# Altium PCB Board_MCU_v3.PcbDoc
Units mm, origin at the board's own origin, x right, y up, seen from the top; angles counter-clockwise.
Board outline 50.04 x 32.77 mm, 2 copper layers (Top Layer, Bottom Layer); 25 components, 34 nets, 121 pads, 0 vias.
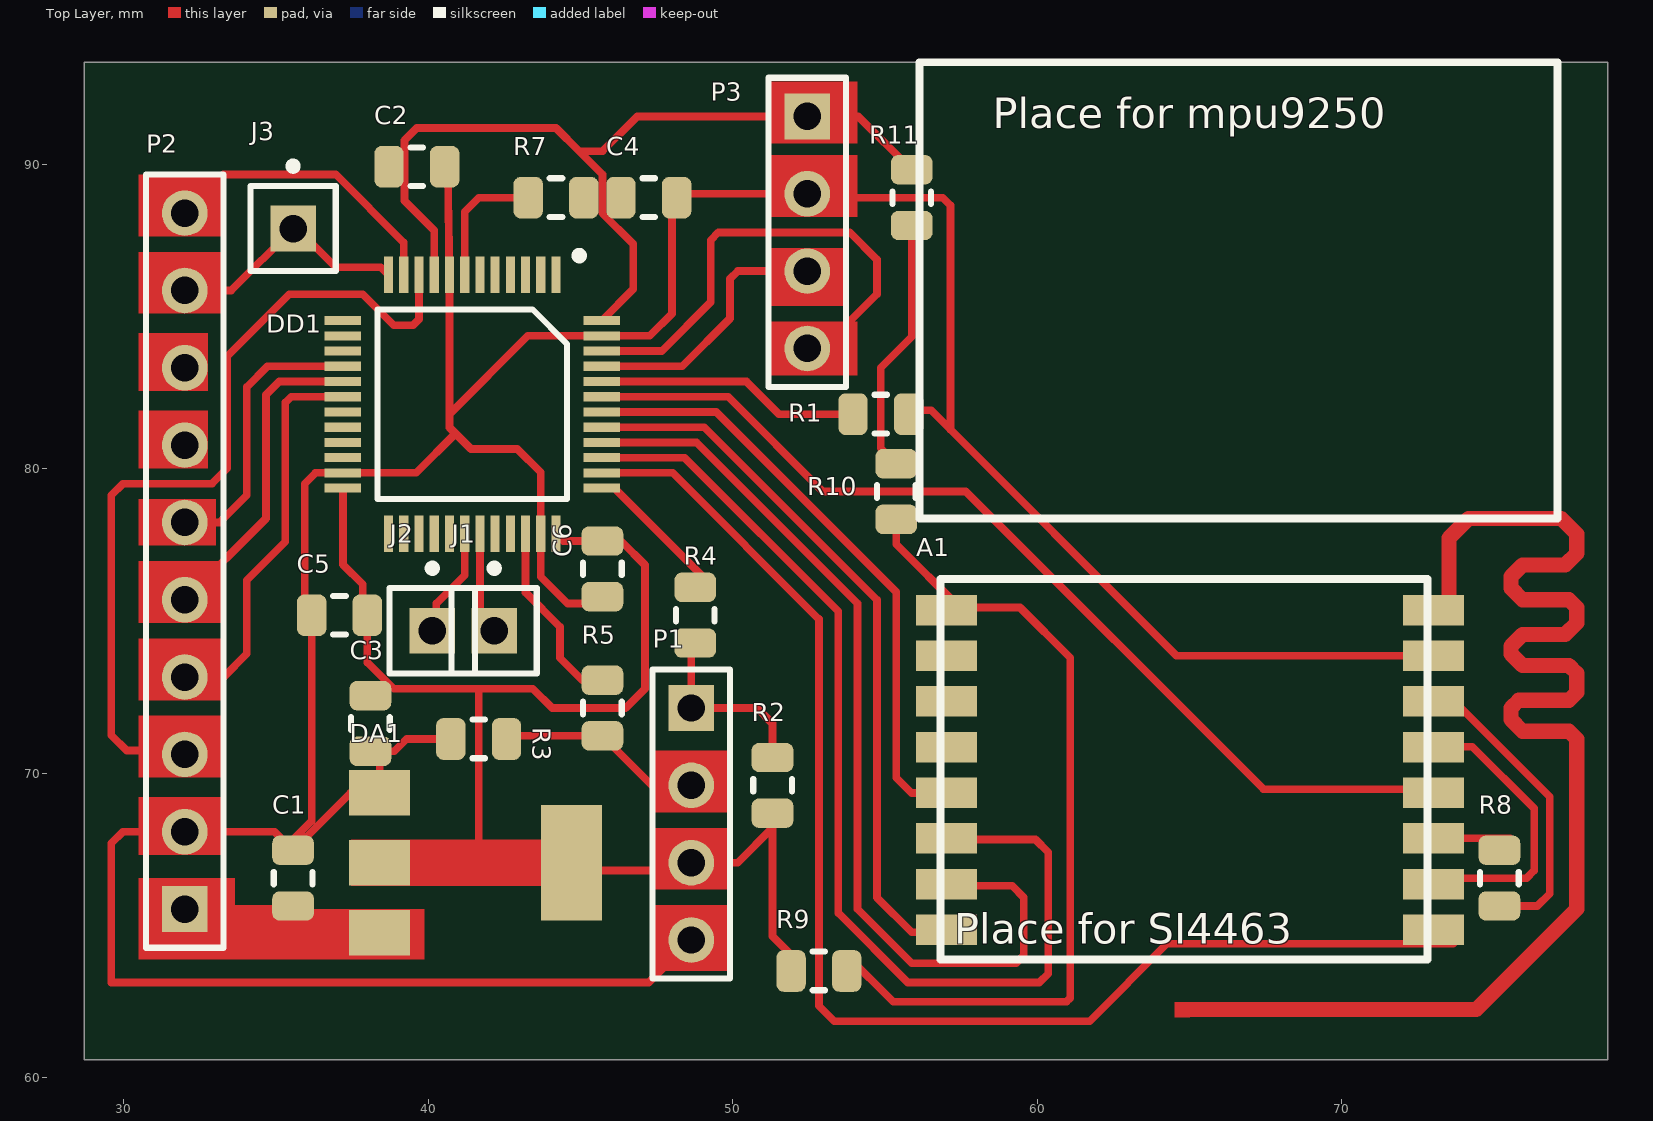
[diagram p0: Top Layer view]
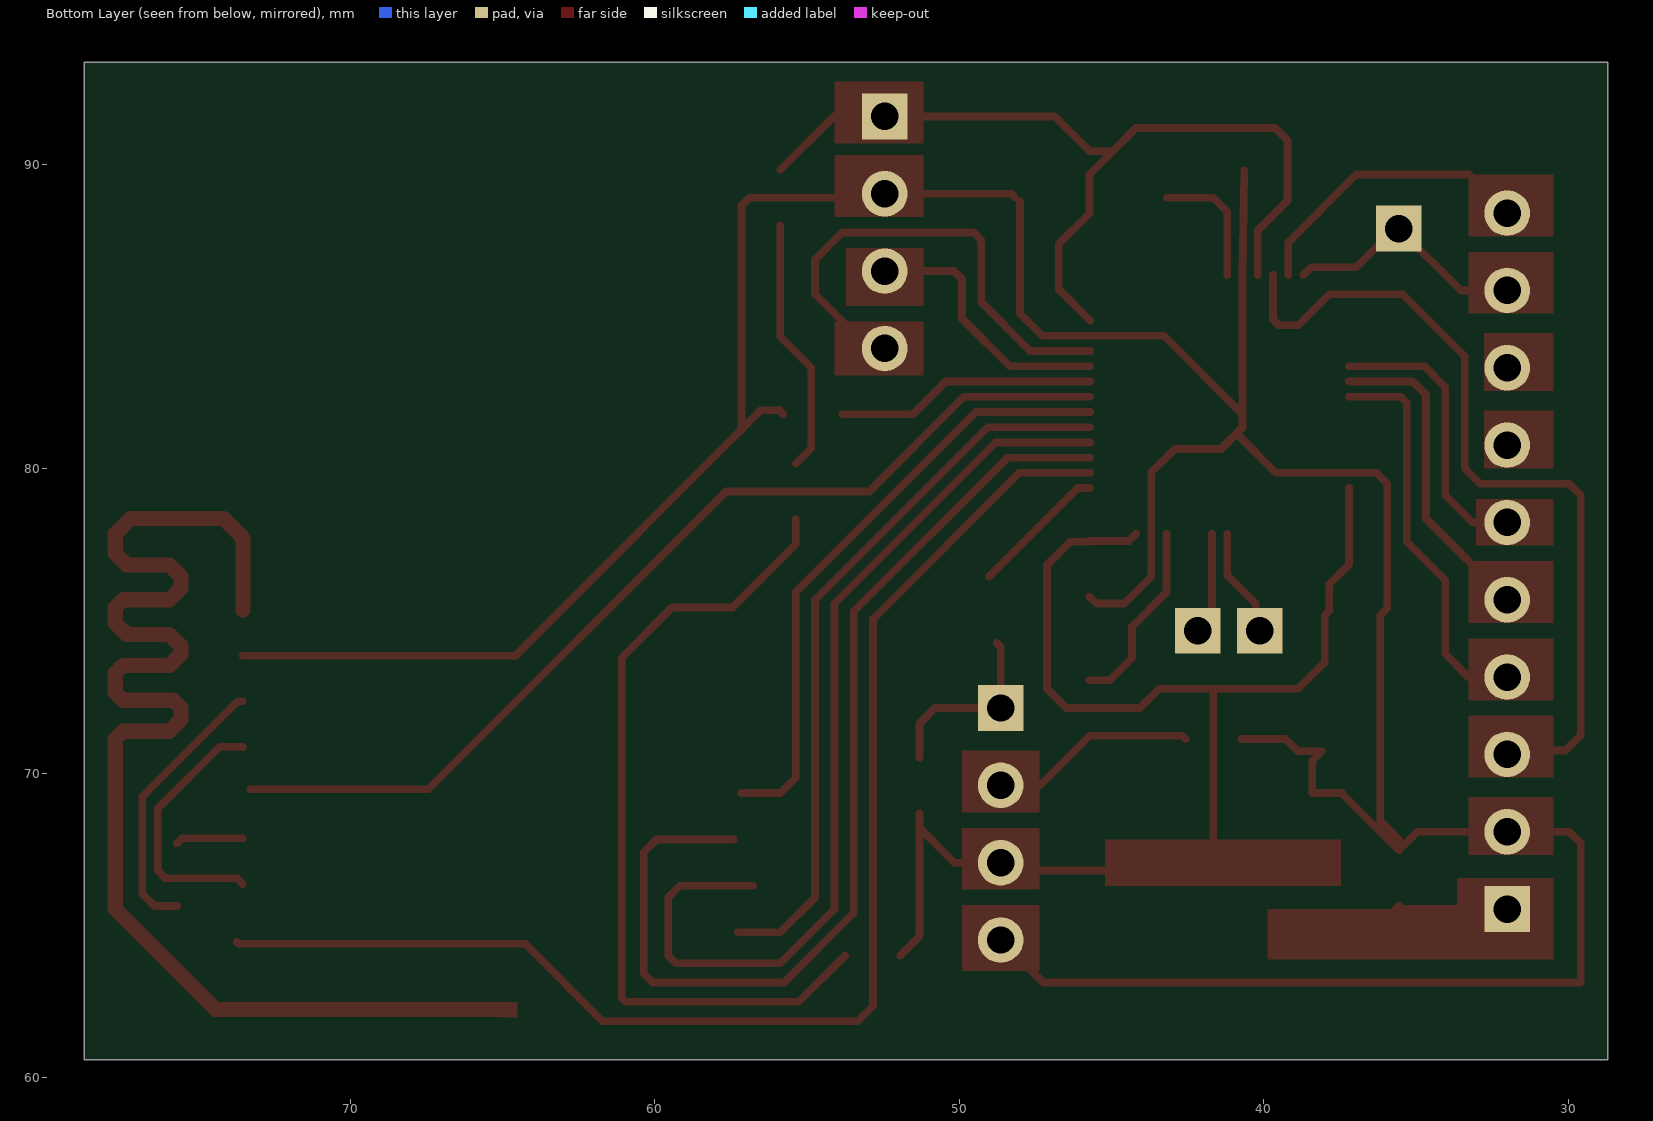
[diagram p1: Bottom Layer view, seen from below]
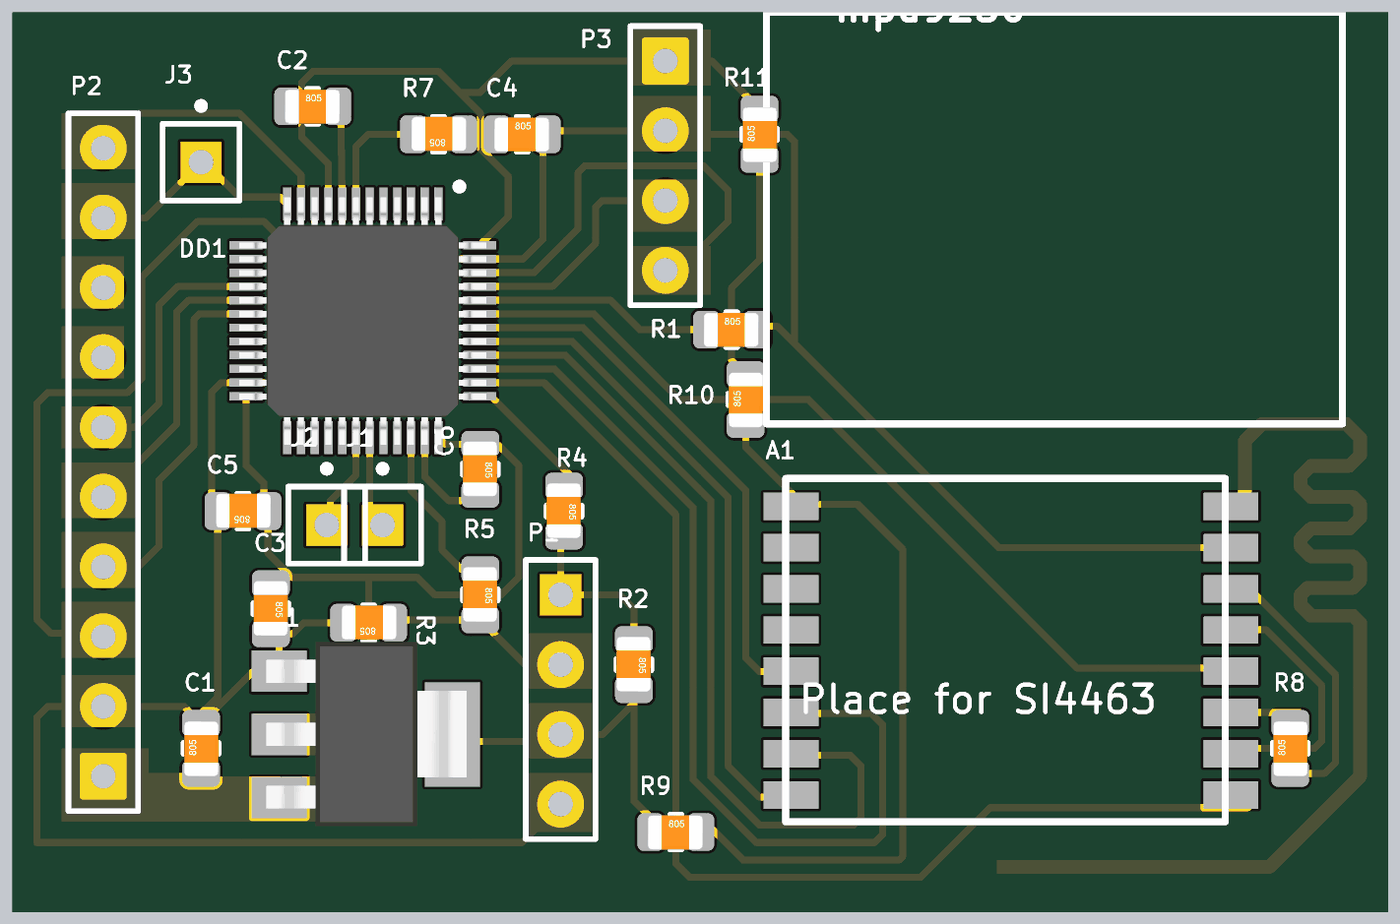
[diagram p2: 3D render of the assembled board from above, using the file's embedded part models]

## Layer stack, top to bottom
Top Layer: signal copper 0.0356
Dielectric: dielectric 0.32, FR-4, Dk 4.8
Bottom Layer: signal copper 0.0356

## Board outline
28.702,60.579 28.702,93.345 78.74,93.345 78.74,60.579

## Design rules (kind name [scope] priority, off if disabled: settings)
Clearance [All] p1: gap=0.1
ComponentClearance [All] p1 off: gap=0.254 collisioncheckmode=3 verticalgap=0.254 showdistances=FALSE
MinimumSolderMaskSliver [All] p1 off: minsoldermaskwidth=0.05
PolygonConnect [All] p1: connectstyle=Relief reliefconductorwidth=0.254 reliefentries=4 polygonreliefangle="90 Angle"
RoutingVias [All] p1: holewidth=0.711 width=1.27 viastyle="Through Hole" minholewidth=0.711 minwidth=1.27 maxholewidth=0.711 maxwidth=1.27
SilkToSilkClearance [All] p1 off: silktosilkclearance=0.254
SilkscreenOverComponentPads [IsPad] p1 off: minsilkscreentomaskgap=0.254
SolderMaskExpansion [All] p1: expansion=0.102
TestPointUsage [All] p1: valid=0 allowmultiple=FALSE
Testpoint [All] p1: side=3 testpointundercomponent=TRUE minsize=1.016 maxsize=2.54 preferedsize=1.524 minholesize=0 maxholesize=1.016 preferedholesize=0.813 testpointgrid=0.025 style=297 order=0123456789
Width [All] p1: maxlimit=2 minlimit=0.254 preferedwidth=0.5
20 further rules are at their usual default settings.

## Components (designator, comment, footprint, x,y, rotation, side; value= is the part's Value field where it differs from the comment)
A1 "Module SI4463" MODULE_SI44663 65.024,70.104 r0 top
C1 "1uF" 0805cap 35.56,66.548 r90 top
C2 "0.1uF" 0805cap 39.624,89.916 r0 top
C3 "1uF" 0805cap 38.1,71.628 r270 top
C4 "0.1uF" 0805cap 47.244,88.9 r0 top
C5 "0.1uF" 0805cap 37.084,75.184 r180 top
C6 "0.1uF" 0805cap 45.72,76.708 r270 top
DA1 "AMS1117-3.3" SOT-223 44.704,67.056 r270 top
DD1 "STM32F103C8T6" STM32L151C 44.196,86.36 r270 top
J1 "Socket" PIN1 42.164,74.676 r0 top
J2 "Socket" PIN1 40.132,74.676 r0 top
J3 "Socket" PIN1 35.56,87.884 r0 top
P1 "Header 4" HDR1X4 48.641,72.136 r270 top
P2 "Header 10" HDR1X10 32.004,65.532 r90 top
P3 "Header 4" HDR1X4 52.451,91.567 r270 top
R1 "10k" 0805res 54.864,81.788 r0 top
R2 "1k N/C" 0805res 51.308,69.596 r270 top
R3 "1k N/C" 0805res 41.656,71.12 r180 top
R4 "150" 0805res 48.768,75.184 r270 top
R5 "150" 0805res 45.72,72.136 r270 top
R7 "1k" 0805res 44.196,88.9 r180 top
R8 "0" 0805res 75.184,66.548 r90 top
R9 "0" 0805res 52.832,63.5 r0 top
R10 "0" 0805res 55.372,79.248 r90 top
R11 "0" 0805res 55.88,88.9 r90 top

## Footprints (in the part's own frame and the unit in brackets; to place one, negate y for a bottom-side part, rotate by r counter-clockwise, add the part's x,y. Pads: shape width x height; smd on the part's side, far side on the other; paste and mask are expansions set on the pad)
0805cap [mil] "http://www.vishay.com/docs/60031/m.pdf (Case 0805) http://www.yageo.com/pdf/NP0_50-to-500V_10.pdf (Case 0805)"
  rrect50% 38x54 smd mask+4: 1(-36,0) 2(36,0)
  silkscreen extent -8,-25 8,25, body extent -40,-25 39,24, height 31
0805res [mil] "http://www.vishay.com/docs/60031/m.pdf (Case 0805) http://www.yageo.com/pdf/NP0_50-to-500V_10.pdf (Case 0805)"
  rrect50% 38x54 smd mask+4: 1(-36,0) 2(36,0)
  silkscreen extent -8,-25 8,25, body extent -40,-25 39,24, height 31
HDR1X4 [mm] "Connector; Header; 4 Position"
  rect 1.5x1.5 hole 0.9: 1(0,0)
  round 1.5 hole 0.9: 2(2.54,0) 3(5.08,0) 4(7.62,0)
  silkscreen extent -1.27,-1.27 8.89,1.27
HDR1X10 [mm] "Connector; Header; 10 Position"
  rect 1.5x1.5 hole 0.9: 1(0,0)
  round 1.5 hole 0.9: 2(2.54,0) 3(5.08,0) 4(7.62,0) 5(10.16,0) 6(12.7,0) 7(15.24,0) 8(17.78,0) 9(20.32,0) 10(22.86,0)
  silkscreen extent -1.27,-1.27 24.13,1.27
MODULE_SI44663 [mm]
  rect 2x1 smd: 1(-8,5.25) 2(-8,3.75) 3(-8,2.25) 4(-8,0.75) 5(-8,-0.75) 6(-8,-2.25) 7(-8,-3.75) 8(-8,-5.25) 9(8,-5.25) 10(8,-3.75) 11(8,-2.25) 12(8,-0.75) 13(8,0.75) 14(8,2.25) 15(8,3.75) 16(8,5.25)
  silkscreen extent -8.2,-6.23 7.8,6.27, body extent -8.2,-6.23 7.79,6.25, height 2
PIN1 [mm] "Connector; Plug"
  rect 1.5x1.5 hole 0.9: 1(0,0)
  silkscreen extent -1.4,-1.4 1.4,2.17
SOT-223 [mm]
  rect 1.5x2 smd: 1(-2.3,-6.3) 2(0,-6.3) 3(2.3,-6.3)
  rect 3.8x2 smd: 4(0,0)
  body extent -3.36,-6.77 3.35,0.52, height 1.8
STM32L151C [mm]
  rect 1.2x0.3 smd: 1(0,0) 2(0,-0.5) 3(0,-1) 4(0,-1.5) 5(0,-2) 6(0,-2.5) 7(0,-3) 8(0,-3.5) 9(0,-4) 10(0,-4.5) 11(0,-5) 12(0,-5.5) 25(8.5,-5.5) 26(8.5,-5) 27(8.5,-4.5) 28(8.5,-4) 29(8.5,-3.5) 30(8.5,-3) 31(8.5,-2.5) 32(8.5,-2) 33(8.5,-1.5) 34(8.5,-1) 35(8.5,-0.5) 36(8.5,0)
  rect 0.3x1.2 smd: 13(1.5,-7) 14(2,-7) 15(2.5,-7) 16(3,-7) 17(3.5,-7) 18(4,-7) 19(4.5,-7) 20(5,-7) 21(5.5,-7) 22(6,-7) 23(6.5,-7) 24(7,-7) 37(7,1.5) 38(6.5,1.5) 39(6,1.5) 40(5.5,1.5) 41(5,1.5) 42(4.5,1.5) 43(4,1.5) 44(3.5,1.5) 45(3,1.5) 46(2.5,1.5) 47(2,1.5) 48(1.5,1.5)
  silkscreen extent -0.76,-5.86 7.36,0.89, body extent -0.24,-7.25 8.76,1.75, height 1.6

## Part data
A1: library part module_SI4463
C1 C2 C3 C4 C5 C6: library part "Cap 0805"
DA1: library part DA-AMS1117, "LDO 3.3V 0.5A"
DD1: "LQFP48"
P1 P3: "Header, 4-Pin"
P2: "Header, 10-Pin"
R1 R2 R3 R4 R5 R7 R8 R9 R10 R11: library part "Res 0805"

## Nets (pads, with @x,y where several pads share a name; then routed paths per layer and width w, separated by ;. In a path a pad name is that pad's centre, name@x,y a point inside that pad or via, vN(x,y) a via of type N, cw(c..) or ccw(c..) an arc to the next point about the centre after c; other vN are vias at no path point)
3V3: C3.1 C5.1 C6.1 DA1.2 DA1.4 DD1.24 DD1.36 P1.3 R2.2 R9.1 | length 44.7
  Top Layer w0.254: DD1.24 37.196,76.85 37.846,76.2 37.846,75.336 C5.1 37.998,73.635 38.862,72.771 43.434,72.771 44.069,72.136 46.482,72.136 47.117,72.771 47.117,76.835 46.355,77.597 45.745,77.597 C6.1 44.434,77.622 DD1.36 ; DA1.2@38.404,66.929 41.656,66.929 41.656,70.993 41.656,72.771 ; DA1.4@44.831,66.802 P1.3@48.387,66.802 ; P1.3 50.165,67.056 51.308,68.199 R2.2 51.308,64.643 R9.1@51.943,64.008
3V3_2: C2.1 C4.1 DD1.9 DD1.48 P3.1 R7.1 R11.2 | length 31.3
  Top Layer w0.254: DD1.9 40.196,87.82 39.218,88.798 39.218,90.78 39.624,91.186 44.196,91.186 44.958,90.424 ; DD1.48 46.736,85.9 46.736,87.376 45.72,88.392 45.72,89.662 44.958,90.424 ; P3.1@52.476,91.211 P3.1@52.832,91.567 ; 53.34,91.567 P3.1 ; R11.2 54.127,91.567 P3.1 ; 44.958,90.424 45.72,90.424 46.863,91.567 P3.1
5V: C1.1 DA1.3 P2.1 | length 7
  Top Layer w0.254: P2.1 35.458,65.532 C1.1 36.805,64.389 DA1.3@38.404,64.389
ADC_1: DD1.10 P2.3 | length 27.5
  Top Layer w0.254: P2.3 31.877,70.739 30.099,70.739 29.591,71.247 29.591,79.121 29.972,79.502 32.893,79.502 33.401,80.01 33.401,83.693 35.433,85.725 37.846,85.725 38.862,84.709 39.497,84.709 39.696,84.908 DD1.10
ADC_2: DD1.11 P2.10 | length 9.7
  Top Layer w0.254: P2.10 33.274,89.662 36.957,89.662 39.196,87.423 DD1.11
ANTENNA: A1.16 | length 44.3
  Top Layer w0.5: 64.77,62.23 74.422,62.23 77.724,65.532 77.724,71.12 77.47,71.374 75.946,71.374 75.565,71.755 75.565,72.136 75.819,72.39 77.47,72.39 77.724,72.644 77.724,73.279 77.47,73.533 75.946,73.533 75.565,73.914 75.565,74.168 75.946,74.549 77.343,74.549 77.724,74.93 77.724,75.438 77.47,75.692 75.946,75.692 75.565,76.073 75.565,76.454 75.946,76.835 77.343,76.835 77.724,77.216 77.724,77.851 77.216,78.359 74.168,78.359 73.532,77.723 A1.16@73.532,75.354
GND: A1.15 C1.2 C2.2 C3.2 C4.2 C5.2 C6.2 DA1.1 DD1.8 DD1.23 DD1.35 DD1.47 P1.4 P2.2 P3.2 R1.2 R3.2 | length 126.7
  Top Layer w0.254: DA1.1@38.404,69.342 37.44,69.342 C1.2 ; DA1.1 38.404,70.41 C3.2 38.887,70.714 39.293,71.12 R3.2 ; C2.2@40.64,89.789 DD1.8 40.696,81.788 ; C6.2 45.491,75.565 44.577,75.565 43.696,76.446 DD1.35 43.696,79.875 42.926,80.645 41.402,80.645 40.894,81.153 ; C4.2@48.006,88.773 48.006,85.09 47.276,84.36 DD1.47 43.268,84.36 40.696,81.788 ; C4.2 48.285,89.027 53.34,89.027 ; P3.2@52.476,89.383 P3.2@52.832,89.027 ; 53.721,89.027 53.848,88.9 56.896,88.9 57.15,88.646 57.15,81.28 ; R1.2 55.905,81.915 56.515,81.915 64.576,73.854 A1.15@73.532,73.854 ; C1.2 35.56,67.818 36.17,68.428 C5.2 35.941,75.413 35.941,79.502 36.299,79.86 DD1.23 39.601,79.86 40.894,81.153 ; C1.2 34.95,68.072 P2.2 29.972,68.072 29.591,67.691 29.591,63.119 47.244,63.119 ; 40.696,81.788 40.696,81.351 40.894,81.153 ; 47.244,63.119 P1.4 47.244,63.119
I2C_CLK: DD1.45 P3.3 | length 10.1
  Top Layer w0.254: DD1.45 48.339,83.36 49.911,84.932 49.911,86.233 50.165,86.487 53.34,86.487 ; P3.3 P3.3@52.832,86.487
I2C_SDA: DD1.46 P3.4 | length 16
  Top Layer w0.254: DD1.46 47.665,83.86 49.276,85.471 49.276,87.503 49.53,87.757 53.848,87.757 54.737,86.868 54.737,85.725 52.959,83.947 P3.4@52.832,83.947
MCU_BOOT0: DD1.44 R1.1 | length 8.6
  Top Layer w0.254: DD1.44 50.45,82.86 51.522,81.788 R1.1@53.848,81.788
NetA1_1: A1.1 R9.2 R10.1 | length 27.3
  Top Layer w0.254: R9.2@53.746,64.008 55.27,62.484 60.96,62.484 61.087,62.611 61.087,73.787 59.436,75.438 57.448,75.438 55.372,77.514 R10.1
NetA1_10: A1.10 A1.13 | length 8.7
  Top Layer w0.254: A1.10@73.532,66.354 73.726,66.548 76.073,66.548 76.327,66.802 76.327,68.834 74.295,70.866 73.544,70.866 A1.13@73.532,70.854
NetA1_11: A1.11 R8.2 | length 2.2
  Top Layer w0.254: A1.11@73.532,67.854 75.529,67.854 R8.2@75.692,67.691
NetA1_14: A1.14 R8.1 | length 9.1
  Top Layer w0.254: A1.14@73.532,72.354 73.696,72.354 76.835,69.215 76.835,66.04 76.429,65.634 R8.1@75.692,65.634
NetDD1_7: DD1.7 R7.2 | length 4.3
  Top Layer w0.254: DD1.7 41.196,88.44 41.656,88.9 R7.2@43.18,88.9
NetDD1_30: DD1.30 J2.1 | length 3.6
  Top Layer w0.254: J2.1 40.259,74.803 40.259,75.565 41.196,76.502 DD1.30
NetDD1_31: DD1.31 J1.1 | length 3.4
  Top Layer w0.254: DD1.31 41.696,75.144 J1.1 J1.1@42.196,74.708
NetP1_1: P1.1 R2.1 R4.2 | length 6.2
  Top Layer w0.254: R4.2 48.641,74.143 P1.1 50.8,72.136 51.308,71.628 R2.1
NetP1_2: P1.2 R3.1 R5.2 | length 7
  Top Layer w0.254: R3.1 42.672,71.222 R5.2 46.736,70.206 47.346,69.596 P1.2@48.895,69.596
NetR10_2: R10.2 R11.1 | length 8.5
  Top Layer w0.254: R10.2 54.864,80.67 54.864,83.312 55.88,84.328 R11.1
PIN_SET: DD1.12 J3.1 P2.9 | length 8.2
  Top Layer w0.254: P2.9 33.528,85.852 J3.1 ; J3.1@35.56,88.011 36.957,86.614 38.442,86.614 DD1.12
SI_IRQ: A1.5 DD1.42 | length 20.2
  Top Layer w0.254: DD1.42 49.458,81.86 55.372,75.946 55.372,69.85 55.88,69.342 A1.5@57.15,69.342
SI_SDN: A1.12 DD1.43 | length 32.9
  Top Layer w0.254: DD1.43 49.847,82.36 52.959,79.248 57.658,79.248 67.437,69.469 A1.12@73.279,69.469
SI_SEL: A1.9 DD1.38 | length 44
  Top Layer w0.254: DD1.38 48.029,79.86 52.832,75.057 52.832,62.357 53.34,61.849 61.722,61.849 64.262,64.389 73.66,64.389 A1.9@73.724,64.453
SPI1_MISO: A1.7 DD1.40 | length 31.8
  Top Layer w0.254: DD1.40 48.807,80.86 54.102,75.565 54.102,65.532 55.88,63.754 59.309,63.754 59.563,64.008 59.563,65.913 59.182,66.294 A1.7@56.769,66.294
SPI1_MOSI: A1.8 DD1.41 | length 24.2
  Top Layer w0.254: DD1.41 49.069,81.36 54.737,75.692 54.737,65.913 55.88,64.77 A1.8@57.277,64.77
SPI1_SCK: A1.6 DD1.39 | length 34.9
  Top Layer w0.254: DD1.39 48.418,80.36 53.467,75.311 53.467,65.405 55.753,63.119 60.071,63.119 60.361,63.409 60.361,67.401 59.944,67.818 A1.6@57.404,67.818
SWCLK: DD1.37 R4.1 | length 4.5
  Top Layer w0.254: DD1.37 46.116,79.36 R4.1@49.022,76.454
SWDIO: DD1.34 R5.1 | length 6.2
  Top Layer w0.254: DD1.34 43.196,75.93 44.323,74.803 44.323,73.787 45.06,73.05 R5.1
TIM1: DD1.16 P2.6 | length 9.4
  Top Layer w0.254: P2.6 33.147,78.232 34.036,79.121 34.036,82.677 34.719,83.36 DD1.16
TIM2: DD1.17 P2.5 | length 10.5
  Top Layer w0.254: P2.5 34.671,78.359 34.671,82.423 35.108,82.86 DD1.17
TIM3: DD1.18 P2.4 | length 13.1
  Top Layer w0.254: P2.4 33.274,73.152 34.036,73.914 34.036,76.327 35.306,77.597 35.306,82.169 35.497,82.36 DD1.18
UART_RX: P2.8
UART_TX: P2.7
pads on no net: A1.2 A1.3 A1.4 DD1.1 DD1.2 DD1.3 DD1.4 DD1.5 DD1.6 DD1.13 DD1.14 DD1.15 DD1.19 DD1.20 DD1.21 DD1.22 DD1.25 DD1.26 DD1.27 DD1.28 DD1.29 DD1.32 DD1.33

## Other copper
Top Layer:
  rectangle net UART_RX: 30.48,82.55 32.766,84.455
  rectangle net UART_TX: 30.48,80.01 32.766,81.915
  rectangle net ANTENNA: 64.516,61.976 65.024,62.484
  rectangle net NetP1_2: 47.371,68.707 49.911,70.739
  rectangle net 3V3: 47.371,66.167 49.911,68.199
  rectangle net GND: 47.371,63.5 49.911,65.659
  rectangle net 3V3_2: 51.181,90.678 54.102,92.71
  rectangle net GND: 51.181,88.265 54.102,90.297
  rectangle net I2C_CLK: 51.181,85.344 53.721,87.249
  rectangle net I2C_SDA: 51.181,83.058 54.102,84.836
  rectangle net 3V3: 37.465,66.294 45.212,67.818
  rectangle net 5V: 33.655,63.881 39.878,65.532
  rectangle net 5V: 30.48,63.881 33.655,66.548
  rectangle net GND: 30.48,67.31 33.274,69.215
  rectangle net ADC_1: 30.48,69.85 33.274,71.882
  rectangle net TIM3: 30.48,72.39 33.274,74.422
  rectangle net TIM2: 30.48,74.93 33.274,76.962
  rectangle net TIM1: 30.48,77.47 33.02,78.994
  rectangle net PIN_SET: 30.48,85.09 33.274,87.122
  rectangle net ADC_2: 30.48,87.63 33.274,89.662

## Silkscreen, mask and mechanical layers (free items; w line width, h text height)
Top Overlay:
  lines w0.254: 56.134,78.359 56.134,93.345 77.089,93.345 77.089,78.359 56.134,78.359
  text "Place for mpu9250" at 58.547,91.186 h1
  text "Place for SI4463" at 57.277,64.389 h1
Mechanical 2:
  the board outline again, w0.254